# EAGLE board RastoMower (EAGLE 9.6.2), part 1 of 2
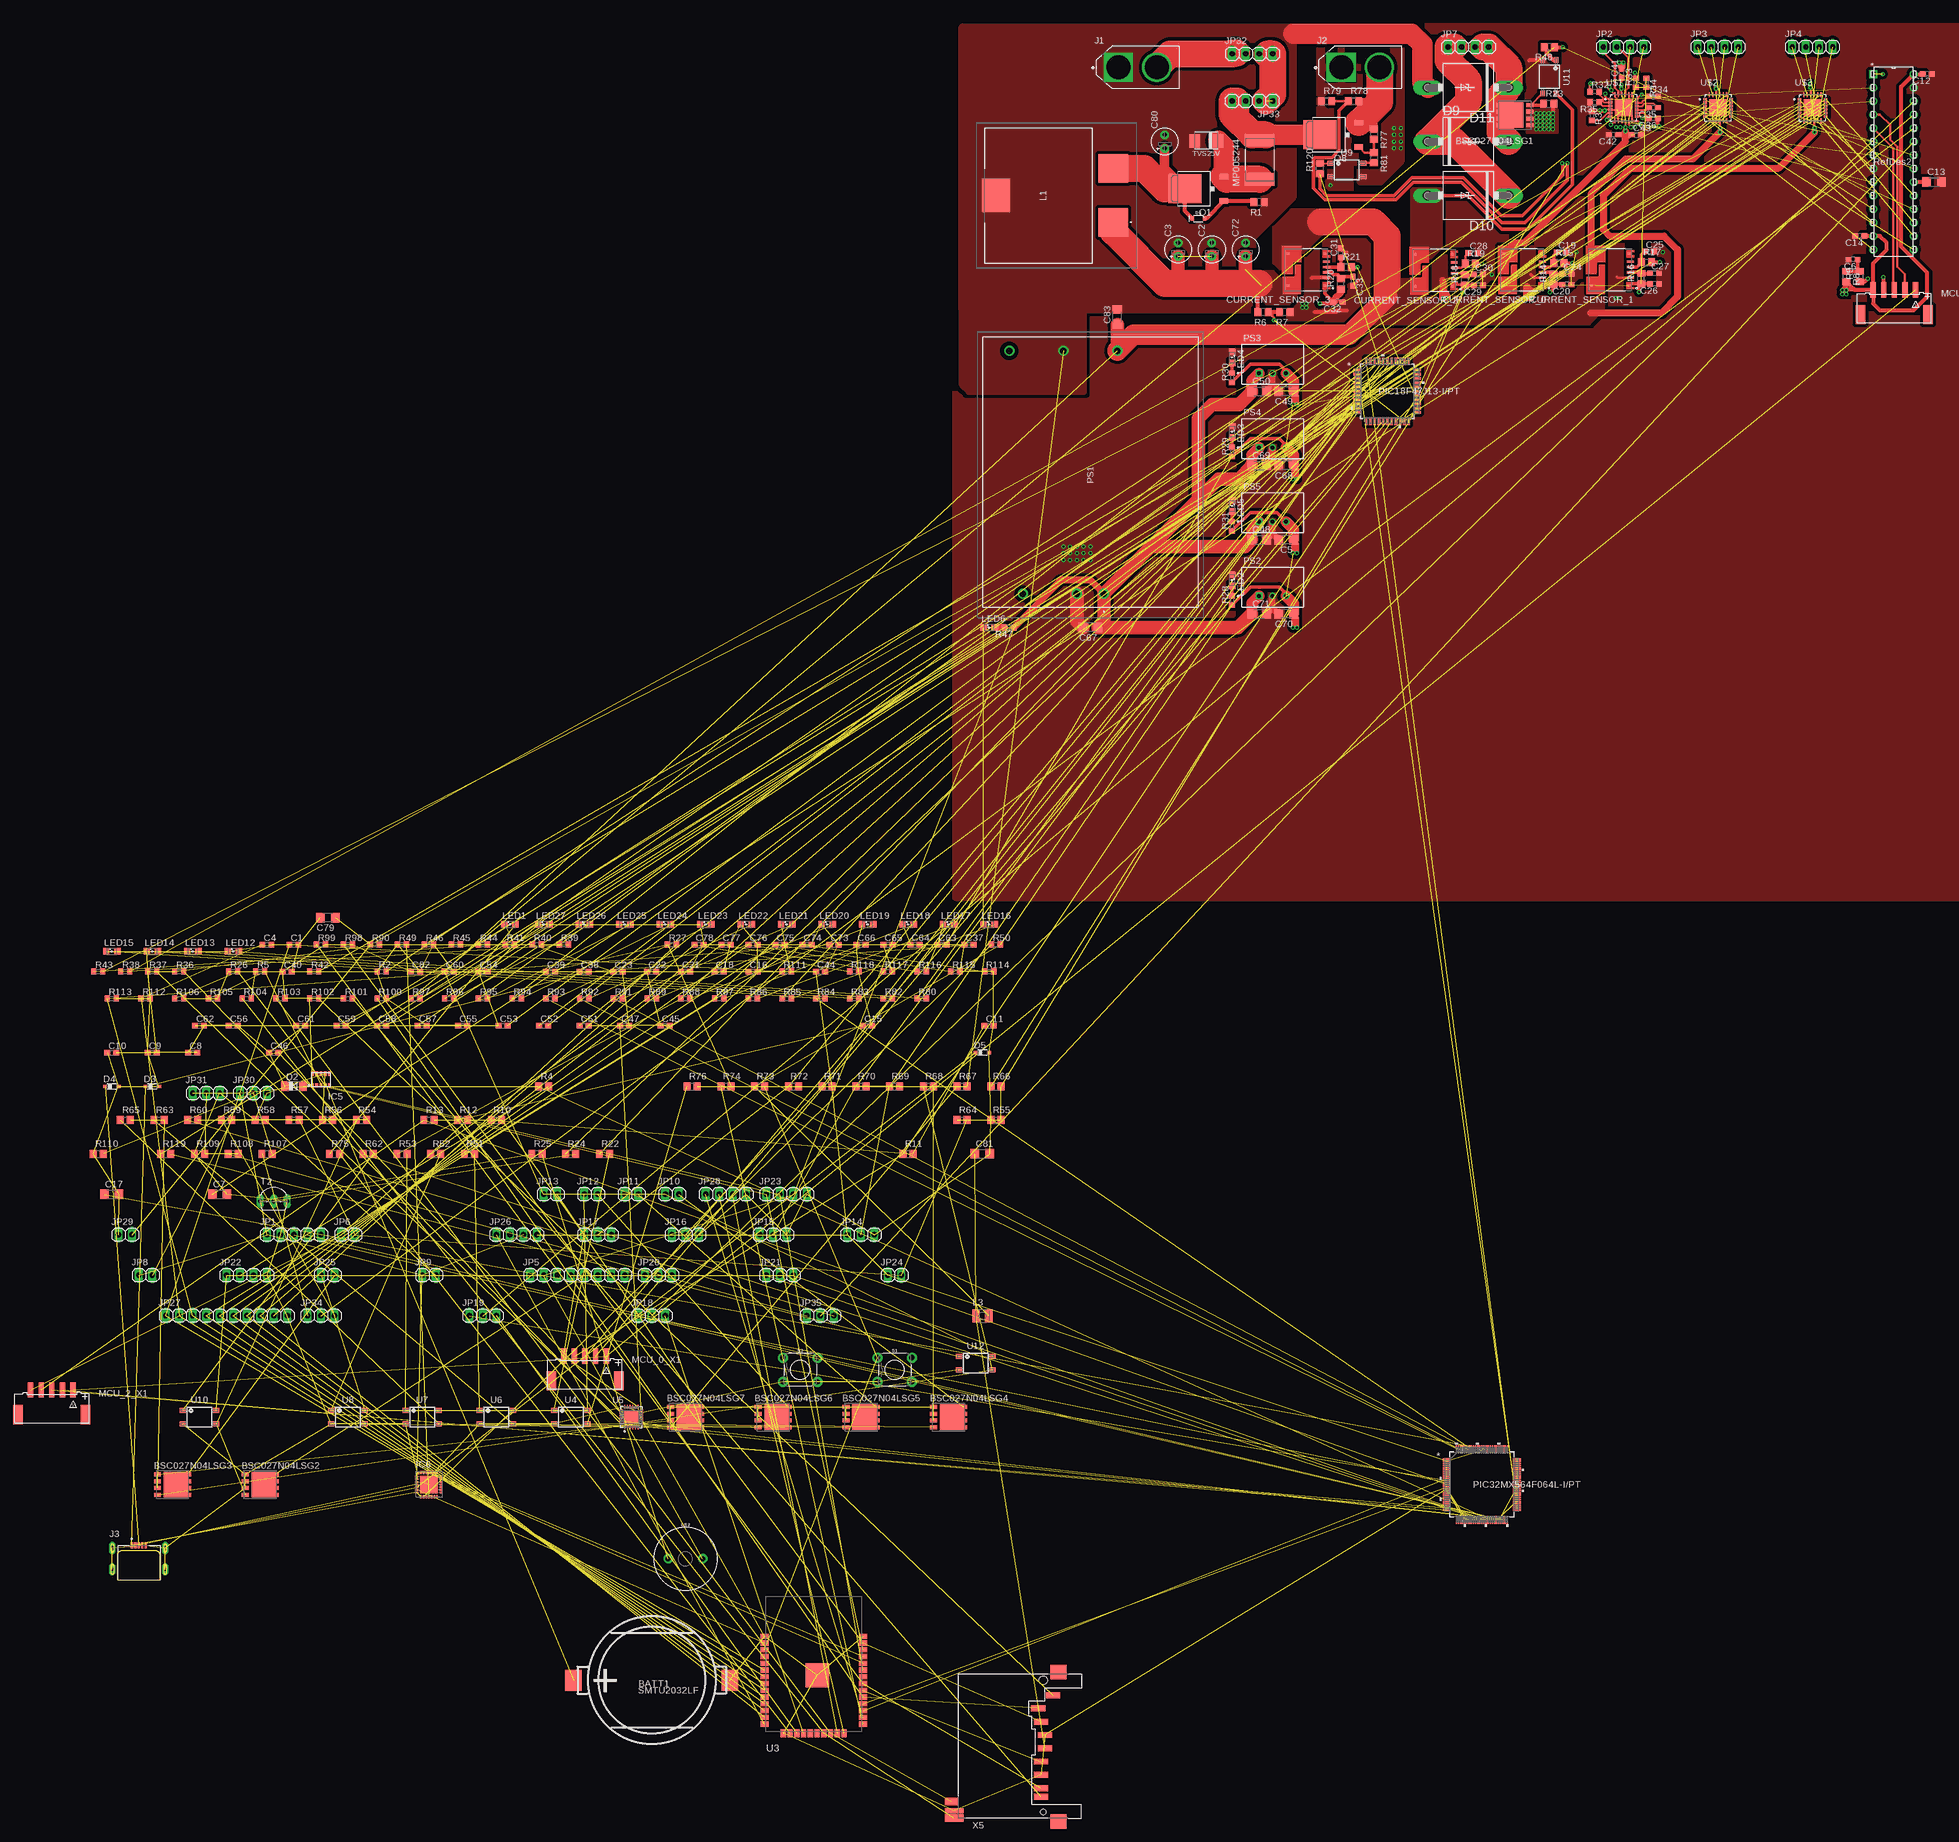
[diagram p0: board, top side]
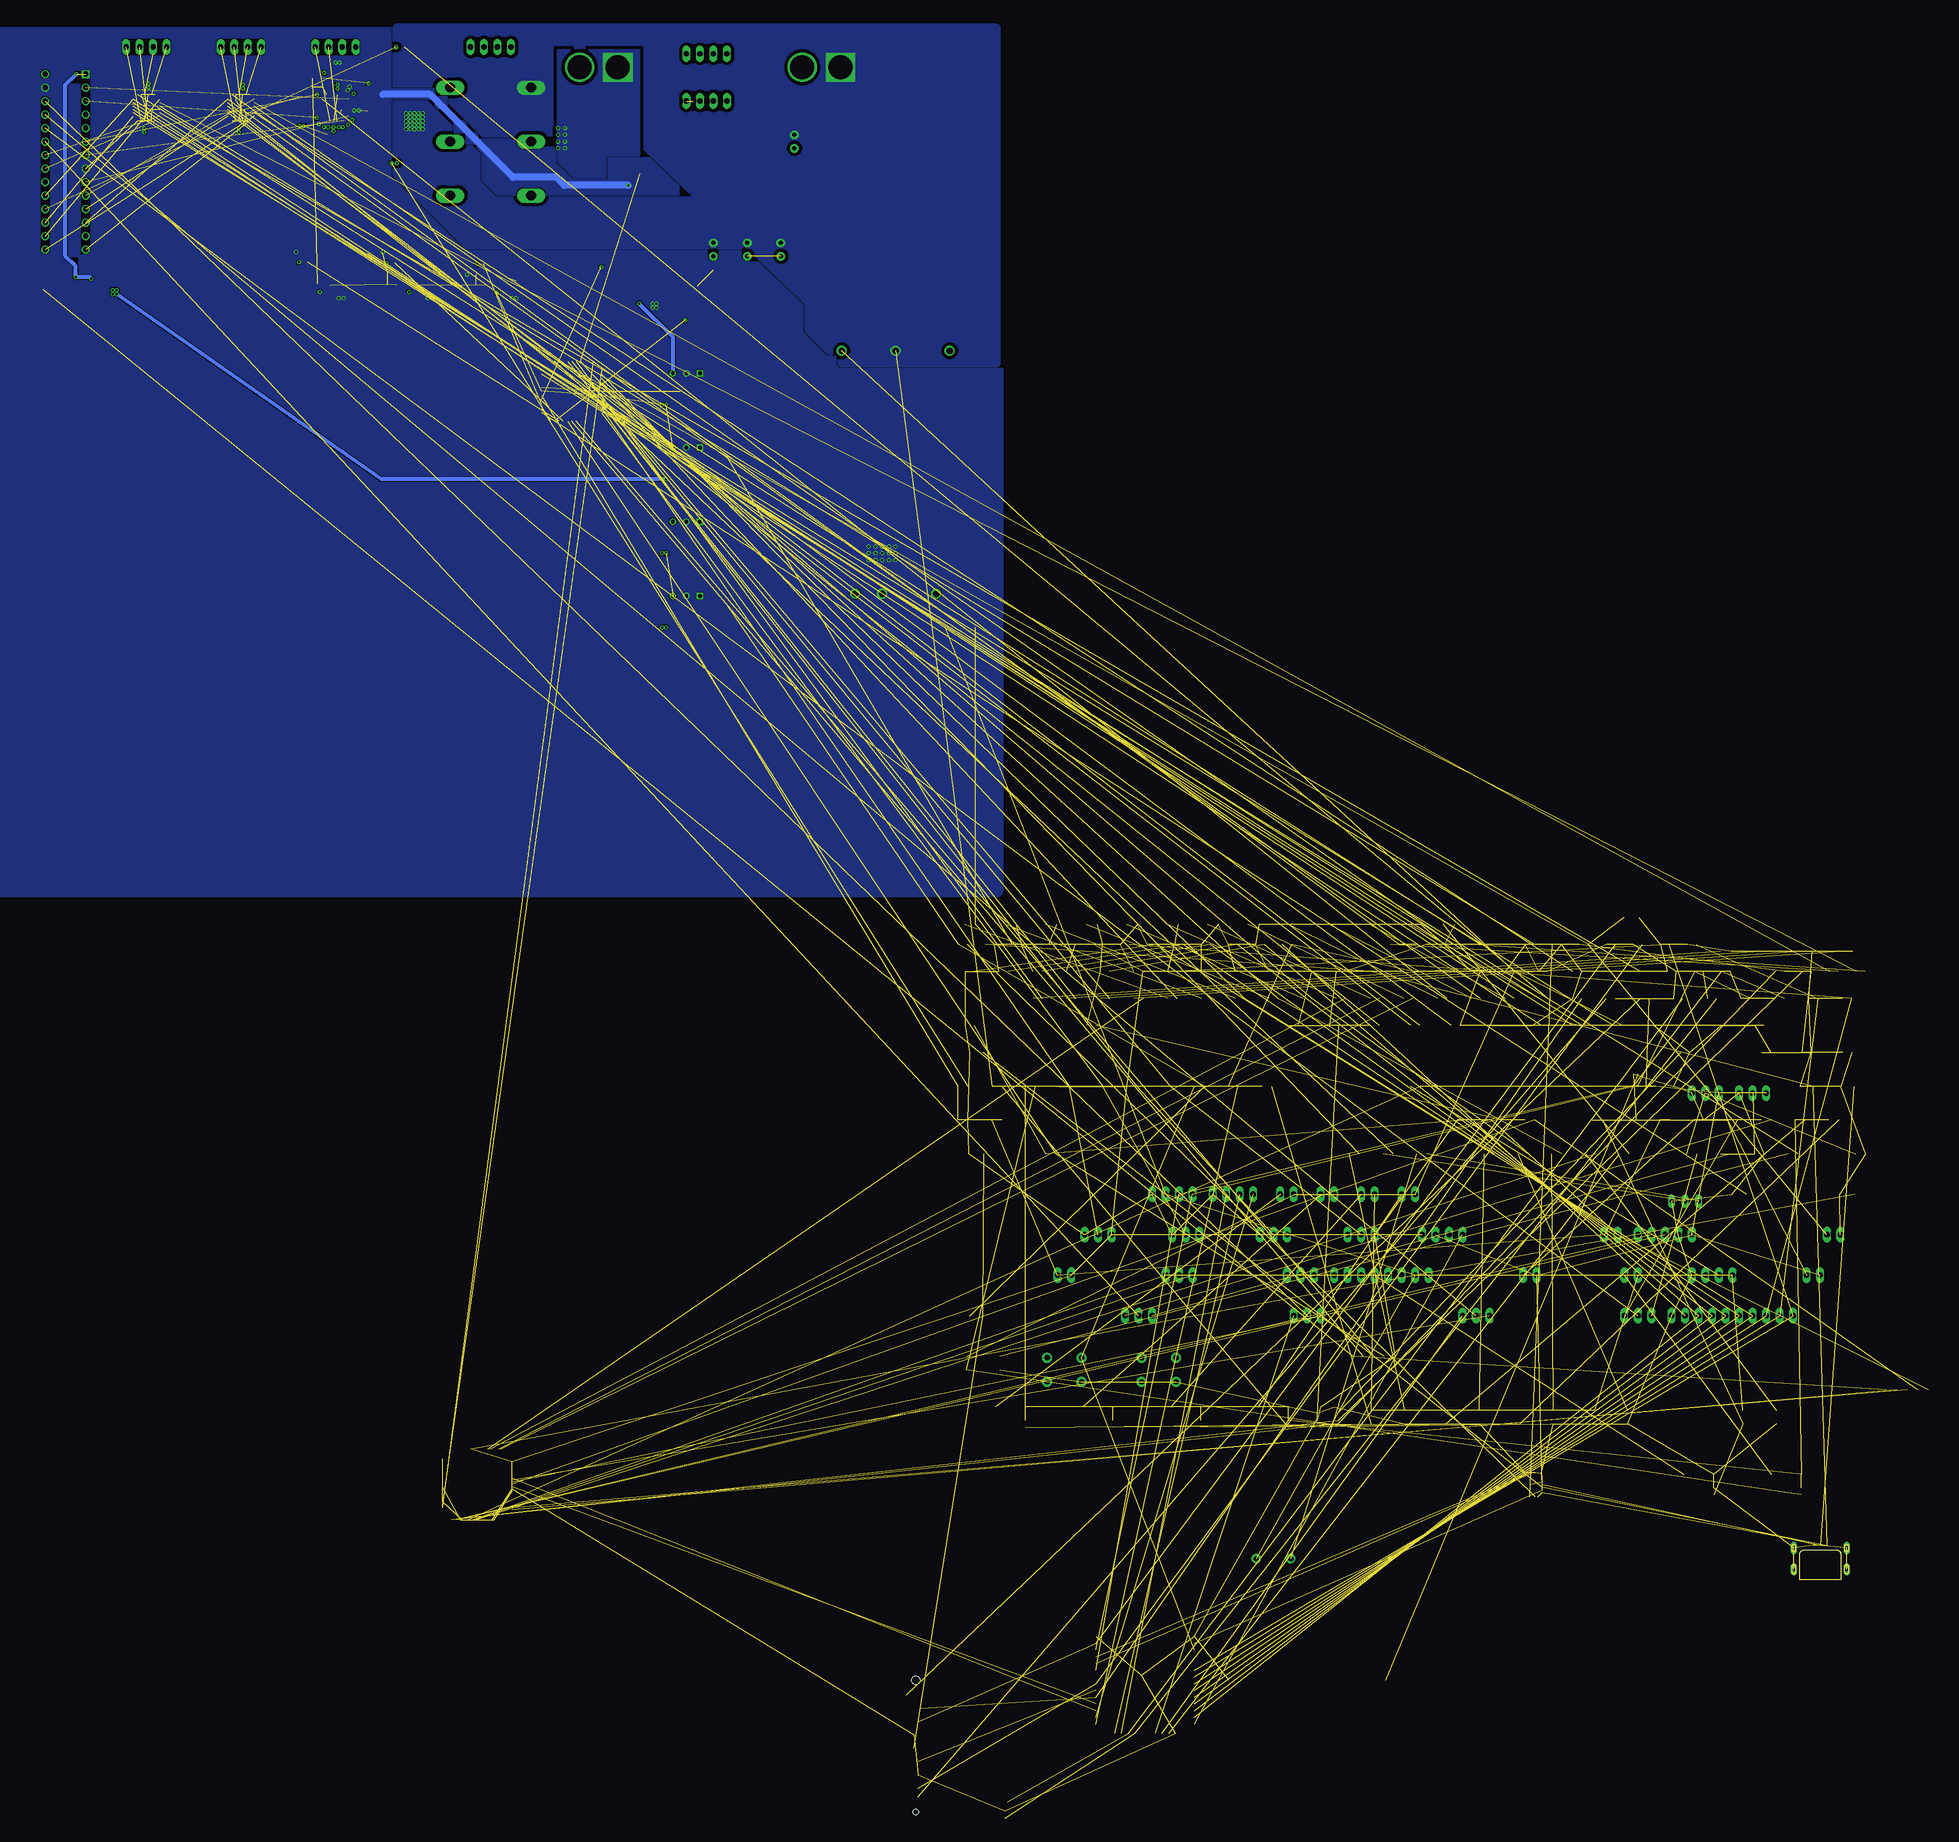
[diagram p1: board, bottom side, seen from below]

No outline drawn. Coordinates in mm, seen from the top.
Copper layers (1*16): Top 0.07mm / dielectric 1.5mm / Bottom 0.07mm
Design rules "default *": minimum track width 6mil, minimum drill 0.35mm, track to track 6mil, track to pad 6mil, pad to pad 6mil, via to via 6mil, smd to smd 6mil, copper to edge 40mil, drill to drill 6mil, minimum pad ring 10mil, minimum via ring 8mil, stop-mask expansion 4mil, vias tented up to drill 0mil, thermal gap 10mil

## Footprints (pad centres in the part's own frame; a part is rotated, then mirrored left to right if it is on the bottom)
SMTU2032LF = smd 3.1 x 4: MINUS 14.7,0; PLUS -14.7,0
PG-TDSON-8 = smd 1.3 x 0.75: 1 -2.825,1.905; 2 -2.825,0.635; 3 -2.825,-0.635; 4 -2.825,-1.905; 5 2.825,-1.905; 6 2.825,-0.635; 7 2.825,0.635; 8 2.825,1.905 | smd 4.7 x 4.8: TH 0.725,0
C0603 = smd 1.1 x 1: 1 -0.85,0; 2 0.85,0
E2,5-5 = drill 0.813 pad 1.6: + -1.27,0 | drill 0.813 pad 1.6 octagon: - 1.27,0
C1206 = smd 1.6 x 1.8: 1 -1.4,0; 2 1.4,0
IC_TLI4971A050T5UE0001XUMA1 = smd 0.4 x 0.4: 1 -3.5,3; 6 -3.5,-3; 7 3.5,-3; 8 3.5,3 | smd 1.3 x 0.4: 2 -3.8,1.5; 3 -3.8,0.5; 4 -3.8,-0.5; 5 -3.8,-1.5
SOD80C = smd 1.4 x 1.8: A 1.7,0; C -1.7,0
SOD323_ST = smd 0.8 x 0.6: A 1.25,0; C -1.25,0
SOD-323 = smd 0.63 x 0.83: A 1.15,0; C -1.15,0
AG = drill 1.803 long: A 7.62,0; C -7.62,0
SPDIP28_300MC = drill 0.991 square: 1 -7.62,33.02 | drill 0.991: 2 -7.62,30.48; 3 -7.62,27.94; 4 -7.62,25.4; 5 -7.62,22.86; 6 -7.62,20.32; 7 -7.62,17.78; 8 -7.62,15.24; 9 -7.62,12.7; 10 -7.62,10.16; 11 -7.62,7.62; 12 -7.62,5.08; 13 -7.62,2.54; 14 -7.62,0; 15 0,0; 16 0,2.54; 17 0,5.08; 18 0,7.62; 19 0,10.16; 20 0,12.7; 21 0,15.24; 22 0,17.78; 23 0,20.32; 24 0,22.86; 25 0,25.4; 26 0,27.94; 27 0,30.48; 28 0,33.02
AB-RTCMC-32.768KHZ-B5ZE-S3-T = smd 0.5 x 0.8: 1 -1.6,-1.1; 2 -0.8,-1.1; 3 0,-1.1; 4 0.8,-1.1; 5 1.6,-1.1; 6 1.6,1.1; 7 0.8,1.1; 8 0,1.1; 9 -0.8,1.1; 10 -1.6,1.1
MLP28 = smd 0.6 x 0.3: 1 -2.3,1.5; 2 -2.3,1; 3 -2.3,0.5; 4 -2.3,0; 5 -2.3,-0.5; 6 -2.3,-1; 7 -2.3,-1.5; 15 2.3,-1.5; 16 2.3,-1; 17 2.3,-0.5; 18 2.3,0; 19 2.3,0.5; 20 2.3,1; 21 2.3,1.5 | smd 0.3 x 0.6: 8 -1.5,-2.3; 9 -1,-2.3; 10 -0.5,-2.3; 11 0,-2.3; 12 0.5,-2.3; 13 1,-2.3; 14 1.5,-2.3; 22 1.5,2.3; 23 1,2.3; 24 0.5,2.3; 25 0,2.3; 26 -0.5,2.3; 27 -1,2.3; 28 -1.5,2.3 | smd 3.3 x 3.3: EXP 0,0 | smd 0.435 x 0.435: M -2.103,2.103
AMASS_XT60-M = drill 4.5 square: 1 -3.6,0 | drill 4.5: 2 3.6,0
MOLEX_47642-0001 = smd 0.45 x 1.1: 1 -1.3,0; 2 -0.65,0; 3 0,0; 4 0.65,0; 5 1.3,0 | drill 0.6 pad 1.2 long: S1 -4.95,-0.52; S2 -4.95,-4.52; S3 4.95,-4.52; S4 4.95,-0.52
1X05 = drill 1.016 long: 1 -5.08,0; 2 -2.54,0; 3 0,0; 4 2.54,0; 5 5.08,0
1X04 = drill 1.016 long: 1 -3.81,0; 2 -1.27,0; 3 1.27,0; 4 3.81,0
1X08 = drill 1.016 long: 1 -8.89,0; 2 -6.35,0; 3 -3.81,0; 4 -1.27,0; 5 1.27,0; 6 3.81,0; 7 6.35,0; 8 8.89,0
1X02 = drill 1.016 long: 1 -1.27,0; 2 1.27,0
1X03 = drill 1.016 long: 1 -2.54,0; 2 0,0; 3 2.54,0
1X10 = drill 1.016 long: 1 -11.43,0; 2 -8.89,0; 3 -6.35,0; 4 -3.81,0; 5 -1.27,0; 6 1.27,0; 7 3.81,0; 8 6.35,0; 9 8.89,0; 10 11.43,0
74436413300 = smd 5.33 x 5.59: 1 -5.075,-10.66; 2 5.075,-10.66 | smd 6.35 x 5.28: 3 0,11.415
L2825P = smd 1.4 x 2.4: 1 -1.2,0; 2 1.2,0
SML0805 = smd 1.2 x 1.2: A 1.05,0; C -1.05,0
BUZZER-12MM = drill 0.9 pad 1.778: + 3.25,0; - -3.25,0
BM05B-PASS = smd 1.8 x 3.6: A 0.15,-3.35; B -12.55,-3.35 | smd 1 x 2.9: P$1 -2.2,1.3; P$2 -4.2,1.3; P$3 -6.2,1.3; P$4 -8.2,1.3; P$5 -10.2,1.3
FUSE_0ZCF0075AF2C = smd 2.3 x 5.6: 1 -3.7,0; 2 3.7,0
TEN251211 = drill 1.25 pad 1.875: 1 0,0; 2 0,-5.08; 3 0,-15.24; 5 -45.72,2.54; 6 -45.72,-7.62; 7 -45.72,-17.78
CONV_TSR_1-2433E = drill 0.73 pad 1.13 square: 1 -2.54,-1.7 | drill 0.73 pad 1.13: 2 0,-1.7; 3 2.54,-1.7
TO252 = smd 1 x 1.6: 1 -2.28,-4.8; 2 2.28,-4.8 | smd 5.4 x 6.2: 3 0,2.5
R0805 = smd 1.3 x 1.5: 1 -0.95,0; 2 0.95,0
R0603 = smd 1 x 1.1: 1 -0.85,0; 2 0.85,0
TACTILE_SWITCH_PTH_6.0MM = drill 1.016 pad 1.88: 1 -3.251,2.261; 2 3.251,2.261; 3 -3.251,-2.261; 4 3.251,-2.261
TO92-CBE = drill 0.813 long: B 0,0; C -2.54,0; E 2.54,0
SUPRESSOR_SMAJ = smd 2 x 2.5: A 2.223,0; C -2.223,0
TQFP44_10X10MC_MCH = smd 1.473 x 0.508: 1 -5.613,4; 2 -5.613,3.2; 3 -5.613,2.4; 4 -5.613,1.6; 5 -5.613,0.8; 6 -5.613,0; 7 -5.613,-0.8; 8 -5.613,-1.6; 9 -5.613,-2.4; 10 -5.613,-3.2; 11 -5.613,-4; 23 5.613,-4; 24 5.613,-3.2; 25 5.613,-2.4; 26 5.613,-1.6; 27 5.613,-0.8; 28 5.613,0; 29 5.613,0.8; 30 5.613,1.6; 31 5.613,2.4; 32 5.613,3.2; 33 5.613,4 | smd 0.508 x 1.473: 12 -4,-5.613; 13 -3.2,-5.613; 14 -2.4,-5.613; 15 -1.6,-5.613; 16 -0.8,-5.613; 17 0,-5.613; 18 0.8,-5.613; 19 1.6,-5.613; 20 2.4,-5.613; 21 3.2,-5.613; 22 4,-5.613; 34 4,5.613; 35 3.2,5.613; 36 2.4,5.613; 37 1.6,5.613; 38 0.8,5.613; 39 0,5.613; 40 -0.8,5.613; 41 -1.6,5.613; 42 -2.4,5.613; 43 -3.2,5.613; 44 -4,5.613
TQFP100_12X12MC_MCH = smd 1.473 x 0.229: 1 -6.617,4.8; 2 -6.617,4.4; 3 -6.617,4; 4 -6.617,3.6; 5 -6.617,3.2; 6 -6.617,2.8; 7 -6.617,2.4; 8 -6.617,2; 9 -6.617,1.6; 10 -6.617,1.2; 11 -6.617,0.8; 12 -6.617,0.4; 13 -6.617,0; 14 -6.617,-0.4; 15 -6.617,-0.8; 16 -6.617,-1.2; 17 -6.617,-1.6; 18 -6.617,-2; 19 -6.617,-2.4; 20 -6.617,-2.8; 21 -6.617,-3.2; 22 -6.617,-3.6; 23 -6.617,-4; 24 -6.617,-4.4; 25 -6.617,-4.8; 51 6.617,-4.8; 52 6.617,-4.4; 53 6.617,-4; 54 6.617,-3.6; 55 6.617,-3.2; 56 6.617,-2.8; 57 6.617,-2.4; 58 6.617,-2; 59 6.617,-1.6; 60 6.617,-1.2; 61 6.617,-0.8; 62 6.617,-0.4; 63 6.617,0; 64 6.617,0.4; 65 6.617,0.8; 66 6.617,1.2; 67 6.617,1.6; 68 6.617,2; 69 6.617,2.4; 70 6.617,2.8; 71 6.617,3.2; 72 6.617,3.6; 73 6.617,4; 74 6.617,4.4; 75 6.617,4.8 | smd 0.229 x 1.473: 26 -4.8,-6.617; 27 -4.4,-6.617; 28 -4,-6.617; 29 -3.6,-6.617; 30 -3.2,-6.617; 31 -2.8,-6.617; 32 -2.4,-6.617; 33 -2,-6.617; 34 -1.6,-6.617; 35 -1.2,-6.617; 36 -0.8,-6.617; 37 -0.4,-6.617; 38 0,-6.617; 39 0.4,-6.617; 40 0.8,-6.617; 41 1.2,-6.617; 42 1.6,-6.617; 43 2,-6.617; 44 2.4,-6.617; 45 2.8,-6.617; 46 3.2,-6.617; 47 3.6,-6.617; 48 4,-6.617; 49 4.4,-6.617; 50 4.8,-6.617; 76 4.8,6.617; 77 4.4,6.617; 78 4,6.617; 79 3.6,6.617; 80 3.2,6.617; 81 2.8,6.617; 82 2.4,6.617; 83 2,6.617; 84 1.6,6.617; 85 1.2,6.617; 86 0.8,6.617; 87 0.4,6.617; 88 0,6.617; 89 -0.4,6.617; 90 -0.8,6.617; 91 -1.2,6.617; 92 -1.6,6.617; 93 -2,6.617; 94 -2.4,6.617; 95 -2.8,6.617; 96 -3.2,6.617; 97 -3.6,6.617; 98 -4,6.617; 99 -4.4,6.617; 100 -4.8,6.617
ESP-32S = smd 1.5 x 1: 1 -9.25,7; 2 -9.25,5.73; 3 -9.25,4.46; 4 -9.25,3.19; 5 -9.25,1.92; 6 -9.25,0.65; 7 -9.25,-0.62; 8 -9.25,-1.89; 9 -9.25,-3.16; 10 -9.25,-4.43; 11 -9.25,-5.7; 12 -9.25,-6.97; 13 -9.25,-8.24; 14 -9.25,-9.51; 25 9.25,-9.51; 26 9.25,-8.24; 27 9.25,-6.97; 28 9.25,-5.7; 29 9.25,-4.43; 30 9.25,-3.16; 31 9.25,-1.89; 32 9.25,-0.62; 33 9.25,0.65; 34 9.25,1.92; 35 9.25,3.19; 36 9.25,4.46; 37 9.25,5.73; 38 9.25,7 | smd 1 x 1.5: 15 -5.7,-11.25; 16 -4.43,-11.25; 17 -3.16,-11.25; 18 -1.89,-11.25; 19 -0.62,-11.25; 20 0.65,-11.25; 21 1.92,-11.25; 22 3.19,-11.25; 23 4.46,-11.25; 24 5.73,-11.25 | smd 4.5 x 4.5: GND 0.68,-0.33
WL-OCPT_SOP4 = smd 1.1 x 0.9: 1 -3.15,1.27; 2 -3.15,-1.27; 3 3.15,-1.27; 4 3.15,1.27
24-VFQFN = smd 0.26 x 0.69: 1 -1.25,-1.92; 2 -0.75,-1.92; 3 -0.25,-1.92; 4 0.25,-1.92; 5 0.75,-1.92; 6 1.25,-1.92; 13 1.25,1.92; 14 0.75,1.92; 15 0.25,1.92; 16 -0.25,1.92; 17 -0.75,1.92; 18 -1.25,1.92 | smd 0.69 x 0.26: 7 1.92,-1.25; 8 1.92,-0.75; 9 1.92,-0.25; 10 1.92,0.25; 11 1.92,0.75; 12 1.92,1.25; 19 -1.92,1.25; 20 -1.92,0.75; 21 -1.92,0.25; 22 -1.92,-0.25; 23 -1.92,-0.75; 24 -1.92,-1.25 | smd 2.7 x 2.6: 25 0,0
QFN65P500X500X100-25N = smd 0.81 x 0.32: 1 -2.45,1.625; 2 -2.45,0.975; 3 -2.45,0.325; 4 -2.45,-0.325; 5 -2.45,-0.975; 6 -2.45,-1.625; 13 2.45,-1.625; 14 2.45,-0.975; 15 2.45,-0.325; 16 2.45,0.325; 17 2.45,0.975; 18 2.45,1.625 | smd 0.32 x 0.81: 7 -1.625,-2.45; 8 -0.975,-2.45; 9 -0.325,-2.45; 10 0.325,-2.45; 11 0.975,-2.45; 12 1.625,-2.45; 19 1.625,2.45; 20 0.975,2.45; 21 0.325,2.45; 22 -0.325,2.45; 23 -0.975,2.45; 24 -1.625,2.45 | smd 3.25 x 3.25: 25 0,0
FPS009-3000 = smd 2.65 x 1.1: 1 -0.915,-5.3; 2 -0.415,-7.8; 3 0.385,-10.3; 4 0.385,-12.8; 5 -0.415,-15.3; 6 -0.415,-17.8; 7 -0.415,-20.3; 8 -0.415,-21.925; 9 1.885,-2.8 | smd 3.5 x 1: COM_TERM -16.75,-24.55 | smd 2.5 x 1.4: DETECT -17.25,-22.85 | smd 3 x 2.7: M1 2.85,1.55; M2 2.85,-26.55 | smd 3.5 x 1.4: WRITE_PROT -16.75,-25.95 | hole 1.6: 0,0 | hole 1.1: 0,-24.8

## Placement (x,y rotation side)
BATT1  SMTU2032LF  [SMTU2032LF]  -81.28,57.15 0 top
BSC027N04LSG1  BSC340N08NS3G  [PG-TDSON-8]  81.15,351.66 180 top
BSC027N04LSG2  BSC340N08NS3G  [PG-TDSON-8]  -154.94,93.98 0 top
BSC027N04LSG3  BSC340N08NS3G  [PG-TDSON-8]  -171.45,93.98 0 top
BSC027N04LSG4  BSC340N08NS3G  [PG-TDSON-8]  -25.4,106.68 0 top
BSC027N04LSG5  BSC340N08NS3G  [PG-TDSON-8]  -41.91,106.68 0 top
BSC027N04LSG6  BSC340N08NS3G  [PG-TDSON-8]  -58.42,106.68 0 top
BSC027N04LSG7  BSC340N08NS3G  [PG-TDSON-8]  -74.93,106.68 0 top
C1  10n  [C0603]  -148.59,195.58 0 top
C2  220u  [E2,5-5]  24.13,326.39 90 top
C3  220u  [E2,5-5]  17.78,326.39 90 top
C4  10n  [C0603]  -153.67,195.58 0 top
C5  4.7u  [C1206]  38.1,271.78 180 top
C6  100nF  [C0603]  144.78,324.49 180 top
C7  10u 6.3V  [C1206]  -162.56,148.59 0 top
C8  100nF  [C0603]  -167.64,175.26 0 top
C9  100nF  [C0603]  -175.26,175.26 0 top
C10  100nF  [C0603]  -182.88,175.26 0 top
C11  100nF  [C0603]  -17.78,180.34 0 top
C12  100nF  [C0603]  158.75,359.41 180 top
C13  10u 6.3V  [C1206]  160.02,339.09 0 top
C14  100nF  [C0603]  146.05,328.93 180 top
C15  100nF  [C0603]  -40.64,180.34 0 top
C16  100n  [C0603]  -62.23,190.5 0 top
C17  10u 6.3V  [C1206]  -182.88,148.59 0 top
C18  100n  [C0603]  -68.58,190.5 0 top
C19  6.8nF 25V  [C0603]  89.92,325.88 0 top
C20  6.8nF 25V  [C0603]  90.93,319.79 180 top
C21  100n  [C0603]  -74.93,190.5 0 top
C22  100n  [C0603]  -81.28,190.5 0 top
C23  100n  [C0603]  -87.63,190.5 0 top
C24  6.8nF 25V  [C0603]  90.93,321.82 0 top
C25  6.8nF 25V  [C0603]  106.43,326.01 0 top
C26  6.8nF 25V  [C0603]  107.44,319.91 180 top
C27  6.8nF 25V  [C0603]  107.44,321.94 0 top
C28  6.8nF 25V  [C0603]  73.28,325.75 0 top
C29  6.8nF 25V  [C0603]  74.3,319.66 180 top
C30  6.8nF 25V  [C0603]  74.3,321.69 0 top
C31  6.8nF 25V  [C0603]  48.39,325.75 90 top
C32  6.8nF 25V  [C0603]  47.88,316.48 180 top
C33  6.8nF 25V  [C0603]  50.67,320.42 270 top
C34  220nF  [C0603]  107.19,355.22 0 top
C35  100nF  [C0603]  107.19,353.06 180 top
C36  100nF  [C0603]  107.19,351.03 180 top
C37  1u  [C0603]  -21.59,195.58 0 top
C38  100n  [C0603]  -93.98,190.5 0 top
C39  100n  [C0603]  -100.33,190.5 0 top
C40  4.7u  [C0603]  -149.86,190.5 0 top
C41  100n  [C0603]  101.22,359.54 90 top
C42  100nF  [C0603]  99.69,347.98 180 top
C43  4.7uF  [C0603]  104.01,347.98 0 top
C44  10nF  [C0603]  -49.53,190.5 0 top
C45  100nF  [C0603]  -78.74,180.34 0 top
C46  2.2nF 50V  [C0603]  -152.4,175.26 0 top
C47  100nF  [C0603]  -86.36,180.34 0 top
C48  4.7u  [C1206]  33.02,271.78 0 top
C49  4.7u  [C1206]  38.1,299.72 180 top
C50  4.7u  [C1206]  33.02,299.72 0 top
C51  220nF  [C0603]  -93.98,180.34 0 top
C52  100nF  [C0603]  -101.6,180.34 0 top
C53  100nF  [C0603]  -109.22,180.34 0 top
C54  100n  [C0603]  -113.03,190.5 0 top
C55  100nF  [C0603]  -116.84,180.34 0 top
C56  4.7uF  [C0603]  -160.02,180.34 0 top
C57  220nF  [C0603]  -124.46,180.34 0 top
C58  100nF  [C0603]  -132.08,180.34 0 top
C59  100nF  [C0603]  -139.7,180.34 0 top
C60  100n  [C0603]  -119.38,190.5 0 top
C61  100nF  [C0603]  -147.32,180.34 0 top
C62  4.7uF  [C0603]  -166.37,180.34 0 top
C63  1u  [C0603]  -26.67,195.58 0 top
C64  1u  [C0603]  -31.75,195.58 0 top
C65  1u  [C0603]  -36.83,195.58 0 top
C66  1u  [C0603]  -41.91,195.58 0 top
C67  4.7u  [C1206]  1.27,255.27 180 top
C68  4.7u  [C1206]  38.1,285.75 180 top
C69  4.7u  [C1206]  33.02,285.75 0 top
C70  4.7u  [C1206]  38.1,257.81 180 top
C71  4.7u  [C1206]  33.02,257.81 0 top
C72  220u  [E2,5-5]  30.48,326.39 90 top
C73  10n  [C0603]  -46.99,195.58 0 top
C74  10n  [C0603]  -52.07,195.58 0 top
C75  10n  [C0603]  -57.15,195.58 0 top
C76  10n  [C0603]  -62.23,195.58 0 top
C77  10n  [C0603]  -67.31,195.58 0 top
C78  10n  [C0603]  -72.39,195.58 0 top
C79  100n  [C1206]  -142.24,200.66 180 top
C80  220u  [E2,5-5]  15.24,346.71 90 top
C81  47u/6V3  [C1206]  -19.05,156.21 0 top
C82  100n  [C0603]  -125.73,190.5 0 top
C83  4.7u  [C1206]  6.35,313.69 90 top
CURRENT_SENSOR_0  TLI4971A050T5UE0001XUMA1  [IC_TLI4971A050T5UE0001XUMA1]  82.55,322.58 180 top
CURRENT_SENSOR_1  TLI4971A050T5UE0001XUMA1  [IC_TLI4971A050T5UE0001XUMA1]  99.06,322.58 180 top
CURRENT_SENSOR_2  TLI4971A050T5UE0001XUMA1  [IC_TLI4971A050T5UE0001XUMA1]  65.91,322.45 180 top
CURRENT_SENSOR_3  TLI4971A050T5UE0001XUMA1  [IC_TLI4971A050T5UE0001XUMA1]  41.91,322.58 180 top
D2  3V3  [SOD80C]  -148.59,168.91 0 top
D3  BAT60J  [SOD323_ST]  -175.26,168.91 0 top
D4  BAT60J  [SOD323_ST]  -182.88,168.91 0 top
D5  BAT60J  [SOD323_ST]  -19.05,175.26 0 top
D6  6.8V  [SOD-323]  21.59,332.23 0 top
D9  [AG]  72.39,346.71 0 top
D10  [AG]  72.39,336.55 180 top
D11  [AG]  72.39,356.87 180 top
IC1  PIC24FJ32GA002-X  [SPDIP28_300MC]  156.21,326.39 0 top
IC5  [AB-RTCMC-32.768KHZ-B5ZE-S3-T]  -143.51,170.18 0 top
IC6  CP2102  [MLP28]  -123.19,93.98 0 top
J1  XT60-M  [AMASS_XT60-M]  10.16,360.68 0 top
J2  XT60-M  [AMASS_XT60-M]  52.07,360.68 0 top
J3  MICROUSB  [MOLEX_47642-0001]  -177.8,82.55 0 top
JP1  GPS MODULE  [1X05]  -148.59,140.97 0 top
JP2  STEPPER_0  [1X04]  101.6,364.49 0 top
JP3  STEPPER_1  [1X04]  119.38,364.49 0 top
JP4  STEPPER_2  [1X04]  137.16,364.49 0 top
JP5  LIDAR  [1X08]  -95.25,133.35 0 top
JP6  RAIN SENSOR  [1X02]  -138.43,140.97 0 top
JP7  BLADE MOTOR  [1X04]  72.39,364.49 0 top
JP8  LIMIT SWITCH UP  [1X02]  -176.53,133.35 0 top
JP9  LIMIT SWITCH DOWN  [1X02]  -123.19,133.35 0 top
JP10  FAN_0  [1X02]  -77.47,148.59 0 top
JP11  FAN_1  [1X02]  -85.09,148.59 0 top
JP12  FAN_2  [1X02]  -92.71,148.59 0 top
JP13  FAN_3  [1X02]  -100.33,148.59 0 top
JP14  TEMP SENSOR 0  [1X03]  -41.91,140.97 0 top
JP15  TEMP SENSOR 1  [1X03]  -58.42,140.97 0 top
JP16  TEMP SENSOR 2  [1X03]  -74.93,140.97 0 top
JP17  TEMP SENSOR 3  [1X03]  -91.44,140.97 0 top
JP18  MOTOR DRIVER UART RX SWITCH  [1X03]  -81.28,125.73 0 top
JP19  MOTOR DRIVER UART TX SWITCH  [1X03]  -113.03,125.73 0 top
JP20  LIDAR UART TX SWITCH  [1X03]  -80.01,133.35 0 top
JP21  LIDAR UART RX SWITCH  [1X03]  -57.15,133.35 0 top
JP22  PER.WIRE SENSE  [1X04]  -157.48,133.35 0 top
JP23  DISPLAY  [1X04]  -55.88,148.59 0 top
JP24  PHOTORESISTOR LDR5549  [1X02]  -35.56,133.35 0 top
JP25  EMERGENCY LIGHT  [1X02]  -142.24,133.35 0 top
JP26  ESP32_CAMERA  [1X04]  -106.68,140.97 0 top
JP27  BUTTONS  [1X10]  -161.29,125.73 0 top
JP28  RGB_LED  [1X04]  -67.31,148.59 0 top
JP29  TILT SENSOR  [1X02]  -180.34,140.97 0 top
JP30  [1X03]  -156.21,167.64 0 top
JP31  [1X03]  -165.1,167.64 0 top
JP32  MAIN SWITCH  [1X04]  31.75,363.22 0 top
JP33  CUTOFF SWITCH  [1X04]  31.75,354.33 180 top
JP34  UPPER LIMIT SWITCH SELECTOR  [1X03]  -143.51,125.73 0 top
JP35  BOTTOM LIMIT SWITCH SELECTOR  [1X03]  -49.53,125.73 0 top
L1  7443641500  [74436413300]  -5.08,336.55 90 top
L3  2112805  [L2825P]  -19.05,125.73 0 top
LED1  [SML0805]  -107.95,199.39 0 top
LED2  [SML0805]  27.94,264.16 270 top
LED3  [SML0805]  27.94,292.1 270 top
LED4  [SML0805]  27.94,306.07 270 top
LED5  [SML0805]  27.94,278.13 270 top
LED6  [SML0805]  -17.78,255.27 0 top
LED12  [SML0805]  -160.02,194.31 0 top
LED13  [SML0805]  -167.64,194.31 0 top
LED14  [SML0805]  -175.26,194.31 0 top
LED15  [SML0805]  -182.88,194.31 0 top
LED16  [SML0805]  -17.78,199.39 0 top
LED17  [SML0805]  -25.4,199.39 0 top
LED18  [SML0805]  -33.02,199.39 0 top
LED19  [SML0805]  -40.64,199.39 0 top
LED20  [SML0805]  -48.26,199.39 0 top
LED21  [SML0805]  -55.88,199.39 0 top
LED22  [SML0805]  -63.5,199.39 0 top
LED23  [SML0805]  -71.12,199.39 0 top
LED24  [SML0805]  -78.74,199.39 0 top
LED25  [SML0805]  -86.36,199.39 0 top
LED26  [SML0805]  -93.98,199.39 0 top
LED27  [SML0805]  -101.6,199.39 0 top
LS2  BUZZER-PTH  [BUZZER-12MM]  -74.93,80.01 0 top
MCU_0_X1  BM05B-PASS_STANDARD  [BM05B-PASS]  -87.63,116.84 0 top
MCU_1_X2  BM05B-PASS_STANDARD  [BM05B-PASS]  158.75,317.5 0 top
MCU_2_X1  BM05B-PASS_STANDARD  [BM05B-PASS]  -187.96,110.49 0 top
MP005244  0ZCF0075AF2C  [FUSE_0ZCF0075AF2C]  33.15,343.28 90 top
PS1  TEN_25-1211  [TEN251211]  3.81,261.62 270 top
PS2  TSR_1-2433E  [CONV_TSR_1-2433E]  35.56,262.89 0 top
PS3  TSR_1-2433E  [CONV_TSR_1-2433E]  35.56,304.8 0 top
PS4  TSR_1-2433E  [CONV_TSR_1-2433E]  35.56,290.83 0 top
PS5  TSR_1-2433E  [CONV_TSR_1-2433E]  35.56,276.86 0 top
Q1  FDD4141TO252  [TO252]  21.59,337.82 90 top
Q8  FDD4141TO252  [TO252]  46.99,347.98 90 top
R1  100R  [R0805]  33.02,335.28 180 top
R2  220k  [R0603]  -132.08,190.5 0 top
R3  220k  [R0603]  95.63,351.54 270 top
R4  1k  [R0805]  -101.6,168.91 0 top
R5  4.7k  [R0603]  -154.94,190.5 0 top
R6  1M  [R0805]  33.78,314.58 180 top
R7  110k  [R0805]  37.85,314.58 180 top
R8  10k  [R0805]  143.51,321.31 270 top
R9  1k  [R0805]  146.05,321.31 90 top
R10  10k  [R0805]  -110.49,162.56 0 top
R11  100R  [R0805]  -33.02,156.21 0 top
R12  10k  [R0805]  -116.84,162.56 0 top
R13  1k  [R0805]  -123.19,162.56 0 top
R14  220R  [R0805]  88.39,320.8 90 top
R15  220R  [R0805]  89.41,323.85 0 top
R16  220R  [R0805]  104.9,320.93 90 top
R17  220R  [R0805]  105.92,323.98 0 top
R18  220R  [R0805]  71.75,320.68 90 top
R19  220R  [R0805]  72.77,323.72 0 top
R20  220R  [R0805]  48.39,319.91 90 top
R21  220R  [R0805]  49.4,323.09 0 top
R22  200R  [R0805]  -90.17,156.21 0 top
R23  1k  [R0805]  87.5,353.82 0 top
R24  100R  [R0805]  -96.52,156.21 0 top
R25  100R  [R0805]  -102.87,156.21 0 top
R26  4.7k  [R0603]  -160.02,190.5 0 top
R27  1k  [R0603]  -77.47,195.58 0 top
R28  100R  [R0603]  27.94,260.35 90 top
R29  100R  [R0603]  27.94,288.29 90 top
R30  100R  [R0603]  27.94,302.26 90 top
R31  100R  [R0603]  27.94,274.32 90 top
R32  1.5k  [R0603]  96.14,356.11 0 top
R33  10k  [R0603]  103.89,357.76 90 top
R34  0R  [R0603]  105.92,357.76 270 top
R35  39k  [R0603]  96.14,354.08 180 top
R36  4.7k  [R0603]  -170.18,190.5 0 top
R37  4.7k  [R0603]  -175.26,190.5 0 top
R38  1.5k  [R0603]  -180.34,190.5 0 top
R39  10k  [R0603]  -97.79,195.58 0 top
R40  0R  [R0603]  -102.87,195.58 0 top
R41  39k  [R0603]  -107.95,195.58 0 top
R42  220k  [R0603]  -144.78,190.5 0 top
R43  1.5k  [R0603]  -185.42,190.5 0 top
R44  10k  [R0603]  -113.03,195.58 0 top
R45  0R  [R0603]  -118.11,195.58 0 top
R46  39k  [R0603]  -123.19,195.58 0 top
R47  200R  [R0603]  -13.97,255.27 180 top
R48  100R  [R0805]  87.63,364.49 180 top
R49  10k  [R0603]  -128.27,195.58 0 top
R50  4.7k  [R0603]  -16.51,195.58 0 top
R51  200R  [R0805]  -115.57,156.21 0 top
R52  200R  [R0805]  -121.92,156.21 0 top
R53  200R  [R0805]  -128.27,156.21 0 top
R54  1k  [R0805]  -135.89,162.56 0 top
R55  500k  [R0805]  -16.51,162.56 0 top
R56  10k  [R0805]  -142.24,162.56 0 top
R57  10R  [R0805]  -148.59,162.56 0 top
R58  10k  [R0805]  -154.94,162.56 0 top
R59  10k  [R0805]  -161.29,162.56 0 top
R60  10k  [R0805]  -167.64,162.56 0 top
R62  200R  [R0805]  -134.62,156.21 0 top
R63  1k  [R0805]  -173.99,162.56 0 top
R64  500k  [R0805]  -22.86,162.56 0 top
R65  1k  [R0805]  -180.34,162.56 0 top
R66  10R  [R0805]  -16.51,168.91 0 top
R67  1k  [R0805]  -22.86,168.91 0 top
R68  1k  [R0805]  -29.21,168.91 0 top
R69  5k  [R0805]  -35.56,168.91 0 top
R70  5k  [R0805]  -41.91,168.91 0 top
R71  5k  [R0805]  -48.26,168.91 0 top
R72  5k  [R0805]  -54.61,168.91 0 top
R73  12k  [R0805]  -60.96,168.91 0 top
R74  12k  [R0805]  -67.31,168.91 0 top
R75  220R  [R0805]  -140.97,156.21 0 top
R76  1k  [R0805]  -73.66,168.91 0 top
R77  5K  [R0805]  54.61,348.11 270 top
R78  1M  [R0805]  50.8,354.33 0 top
R79  110k  [R0805]  45.72,354.33 0 top
R80  130R  [R0603]  -30.48,185.42 0 top
R81  220R  [R0805]  54.61,343.66 270 top
R82  130R  [R0603]  -36.83,185.42 0 top
R83  130R  [R0603]  -43.18,185.42 0 top
R84  130R  [R0603]  -49.53,185.42 0 top
R85  130R  [R0603]  -55.88,185.42 0 top
R86  130R  [R0603]  -62.23,185.42 0 top
R87  130R  [R0603]  -68.58,185.42 0 top
R88  130R  [R0603]  -74.93,185.42 0 top
R89  130R  [R0603]  -81.28,185.42 0 top
R90  10k  [R0603]  -133.35,195.58 0 top
R91  130R  [R0603]  -87.63,185.42 0 top
R92  130R  [R0603]  -93.98,185.42 0 top
R93  130R  [R0603]  -100.33,185.42 0 top
R94  130R  [R0603]  -106.68,185.42 0 top
R95  130R  [R0603]  -113.03,185.42 0 top
R96  130R  [R0603]  -119.38,185.42 0 top
R97  130R  [R0603]  -125.73,185.42 0 top
R98  10k  [R0603]  -138.43,195.58 0 top
R99  10k  [R0603]  -143.51,195.58 0 top
R100  1M  [R0603]  -132.08,185.42 0 top
R101  nc  [R0603]  -138.43,185.42 0 top
R102  nc  [R0603]  -144.78,185.42 0 top
R103  10k  [R0603]  -151.13,185.42 0 top
R104  10k  [R0603]  -157.48,185.42 0 top
R105  4.7k  [R0603]  -163.83,185.42 0 top
R106  4.7k  [R0603]  -170.18,185.42 0 top
R107  10k  [R0805]  -153.67,156.21 0 top
R108  10k  [R0805]  -160.02,156.21 0 top
R109  10k  [R0805]  -166.37,156.21 0 top
R110  10k  [R0805]  -185.42,156.21 0 top
R111  10k  [R0603]  -55.88,190.5 0 top
R112  10k  [R0603]  -176.53,185.42 0 top
R113  10k  [R0603]  -182.88,185.42 0 top
R114  10k  [R0603]  -17.78,190.5 0 top
R115  10k  [R0603]  -24.13,190.5 0 top
R116  10k  [R0603]  -30.48,190.5 0 top
R117  10k  [R0603]  -36.83,190.5 0 top
R118  10k  [R0603]  -43.18,190.5 0 top
R119  200R  [R0805]  -172.72,156.21 0 top
R120  200R  [R0805]  44.45,341.63 90 top
S1  MOMENTARY-SWITCH-SPST-PTH-6.0MM  [TACTILE_SWITCH_PTH_6.0MM]  -35.56,115.57 0 top
S2  MOMENTARY-SWITCH-SPST-PTH-6.0MM  [TACTILE_SWITCH_PTH_6.0MM]  -53.34,115.57 0 top
T2  [TO92-CBE]  -152.4,147.32 0 top
TVS25V  SUPRESSOR_TVS-UD-SMAJ  [SUPRESSOR_SMAJ]  23.11,346.84 180 top
U1  PIC18F47J13-I/PT  [TQFP44_10X10MC_MCH]  57.15,299.72 0 top
U2  PIC32MX564F064L-I/PT  [TQFP100_12X12MC_MCH]  74.93,93.98 0 top
U3  ESP-32S  [ESP-32S]  -50.8,58.42 0 top
U4  140357145000  [WL-OCPT_SOP4]  -96.52,106.68 0 top
U5  MPU-6050  [24-VFQFN]  -85.09,106.68 0 top
U6  140357145000  [WL-OCPT_SOP4]  -110.49,106.68 0 top
U7  140357145000  [WL-OCPT_SOP4]  -124.46,106.68 0 top
U8  140357145000  [WL-OCPT_SOP4]  -138.43,106.68 0 top
U9  140357145000  [WL-OCPT_SOP4]  49.53,341.38 0 top
U10  140357145000  [WL-OCPT_SOP4]  -166.37,106.68 0 top
U11  140357145000  [WL-OCPT_SOP4]  87.63,358.9 270 top
U12  140357145000  [WL-OCPT_SOP4]  -20.32,116.84 0 top
U$1  MP6500  [QFN65P500X500X100-25N]  101.6,353.06 0 top
U$2  MP6500  [QFN65P500X500X100-25N]  119.38,353.06 0 top
U$3  MP6500  [QFN65P500X500X100-25N]  137.16,353.06 0 top
X5  FPS009-3000  [FPS009-3000]  -7.62,57.15 0 top

## Library data of the parts
BATT1 = mike
BSC027N04LSG1-BSC027N04LSG7 = transistor-power
C1-C15 C17 C19 C20 C24-C36 C41-C62 C67-C80 C83 = rcl; SPICEPREFIX: C
C16 C18 C21-C23 C81 C82 L3 R98-R106 = rcl
C37-C40 C63-C66 = rcl@1; SPICEPREFIX: C
CURRENT_SENSOR_0 CURRENT_SENSOR_1-CURRENT_SENSOR_3 = TLI4971A050T5UE0001XUMA1; AVAILABILITY: In Stock; DESCRIPTION: Current Sensor 50A 1 Channel Hall Effect, Open Loop Unidirectional 8-PowerTDFN; MF: Infineon Technologies; MP: TLI4971A050T5UE0001XUMA1; PACKAGE: PowerTDFN-8 Infineon Technologies; PRICE: None; PURCHASE-URL: https://pricing.snapeda.com/search/part/TLI4971A050T5UE0001XUMA1/?ref=eda
D2-D5 = diode
D6 = SparkFun-DiscreteSemi; PROD_ID: DIO-08199
D9-D11 = adafruit
IC1 U$1-U$3 = skorra
IC5 = skkumc
IC6 = silabs; MF: FARNELL; MPN: CP2102-GM; OC_FARNELL: 9282130; OC_NEWARK: 30K5635
J1 J2 = XT60-M; AVAILABILITY: In Stock; DESCRIPTION: Plug; DC supply; XT60; male; PIN: 2; for cable; soldered; 30A; 500V; MF: AMASS; MP: XT60-M; PACKAGE: Package; PRICE: None
J3 = skorra; AVAILABILITY: In Stock; DESCRIPTION: USB - micro B - Receptacle Connector 5 Position Board Edge, Cutout; Surface Mount, Right Angle; MF: Molex; MP: 47642-0001; PACKAGE: None; PRICE: None; PURCHASE-URL: https://pricing.snapeda.com/search/part/47642-0001/?ref=eda
JP1-JP35 = pinhead
L1 = 7443641500; DESCRIPTION: Wurth WE-HCF Series Shielded Wire-wound SMD Inductor with a MnZn Core, 15 uH +/-15% 30A Idc; HEIGHT: 15mm; MANUFACTURER_NAME: Wurth Elektronik; MANUFACTURER_PART_NUMBER: 7443641500; MOUSER_PART_NUMBER: 710-7443641500; MOUSER_PRICE-STOCK: https://www.mouser.co.uk/ProductDetail/Wurth-Elektronik/7443641500?qs=Zt3UNFD9mQgHteqNok2K9A%3D%3D
LED1-LED6 LED12-LED27 = led
LS2 = SparkFun-Electromechanical; PROD_ID: COMP-08253; SF_SKU: COM-07950
MCU_0_X1 MCU_1_X2 MCU_2_X1 = _con-JST-PA
MP005244 = PPTC_0ZCF0075AF2C; AVAILABILITY: In Stock; DESCRIPTION: 2920 SMT PPTC | 0.75 Ih | 603V; MF: Bel Fuse; MP: 0ZCF0075AF2C; PACKAGE: 2920 Bel Fuse; PRICE: None; PURCHASE-URL: https://pricing.snapeda.com/search/part/0ZCF0075AF2C/?ref=eda
PS1 = TEN_25-1211; DESCRIPTION: 25 Watt DC/DC converter, industrial, 2:1 input, encapsulated, 2" x 1.6" metal package; HEIGHT: 10mm; MANUFACTURER_NAME: Traco Power; MANUFACTURER_PART_NUMBER: TEN 25-1211; MOUSER_PART_NUMBER: 495-TEN25-1211; MOUSER_PRICE-STOCK: https://www.mouser.co.uk/ProductDetail/TRACO-Power/TEN-25-1211?qs=ckJk83FOD0XS9kGQInWe%252BQ%3D%3D
PS2-PS5 = skorra; AVAILABILITY: In Stock; DESCRIPTION: 1 Amp POL converter, industrial, 6-36 VDC input, pos.-pos. circuit, cost efficient, LM78 compatible, SIP-3; MF: Traco Power; MP: TSR 1-2433E; PACKAGE: NON-STANDARD-3 Traco Power; PRICE: None; PURCHASE-URL: https://pricing.snapeda.com/search/part/TSR 1-2433E/?ref=eda
Q1 Q8 = transistor-fet
R1-R48 R51-R60 R62-R97 R107-R120 = rcl; SPICEPREFIX: R
R49 R50 = rcl@1; SPICEPREFIX: R
S1 S2 = SparkFun-Switches; PROD_ID: SWCH-08441; SF_SKU: COM-00097
T2 = transistor
TVS25V = 52101-101-REV-A_v16
U1 = skorra; COPYRIGHT: Copyright (C) 2022 Ultra Librarian. All rights reserved.; MANUFACTURER_PART_NUMBER: pic18f47j13-i/pt; MFR_NAME: Microchip
U2 = skorra; COPYRIGHT: Copyright (C) 2022 Ultra Librarian. All rights reserved.; MANUFACTURER_PART_NUMBER: PIC32MX564F064L-I/PT; MFR_NAME: Microchip
U3 = skorra; AVAILABILITY: Not in stock; DESCRIPTION: - - Transceiver Module - - Surface Mount; MF: Olimex LTD; MP: ESP-32S; PACKAGE: None; PRICE: None
U4 U6-U12 = Wurth_Optocoupler_WL-OCPT; CTR-MAX: 600%; CTR-MIN: 50%; DATASHEET-URL: https://www.we-online.com/redexpert/spec/140357145000?ae; IF: 60mA; MOUNT: SMT; PART-NUMBER: 140357145000; TC-CTR: IF = 5mA,VCE = 5 V; VCE: 35V; VISO: 3750(V(RMS))
U5 = Sensor; CREATED_BY: PCBLayout.com; DIGIKEY_PART_NUMBER: 1428-1007-1-ND; MANUFACTURER: TDK InvenSense; MPN: MPU-6050; PACKAGE: 24-VFQFN
X5 = con-yamaichi; OC_FARNELL: unknown; OC_NEWARK: unknown

## Nets
3V3_0: C8.2 C9.2 C10.2 C12.2 C14.1 C16.1 C18.1 C20.2 C21.1 C22.1 C23.1 C26.2 C29.2 C32.2 C44.1 C45.1 C49.1 C63.2 C64.2 C65.2 C66.2 C68.1 CURRENT_SENSOR_0.1 CURRENT_SENSOR_1.1 CURRENT_SENSOR_2.1 CURRENT_SENSOR_3.1 IC1.13 IC1.28 JP6.1 JP14.1 JP15.1 JP16.1 JP17.1 JP24.1 MCU_0_X1.P$5 MCU_1_X2.P$5 MCU_2_X1.P$5 PS3.3 PS4.3 R8.2 R10.2 R12.2 R14.1 R16.1 R18.1 R20.1 R29.1 R30.1 R34.1 R36.1 R37.1 R40.1 R45.1 R69.2 R70.2 R71.2 R72.2 R90.2 U1.7 U1.28 U2.2 U2.16 U2.30 U2.37 U2.46 U2.62 U2.86 U5.8 U5.13
3V3_1: C5.1 C39.1 C40.1 C70.1 C82.1 IC5.1 IC6.6 JP1.1 JP8.1 JP9.1 JP26.3 JP30.1 JP31.1 L3.2 PS2.3 PS5.3 R5.1 R26.1 R27.1 R28.1 R31.1 R50.2 R73.1 R74.2 R98.2 R99.2 R101.1 R102.1 R103.2 R104.2 R105.2 R106.2 U3.2
5V: C48.1 C50.1 C67.1 C69.1 C71.1 JP5.2 JP22.1 JP23.3 LS2.+ PS1.1 PS2.1 PS3.1 PS4.1 PS5.1 R47.1 U10.4
12V_STEPPER_0_POS: C36.1 C41.1 C42.1 C43.1 CURRENT_SENSOR_0.7 U$1.10 U$1.22
12V_STEPPER_1_POS: C53.1 C54.1 C55.1 C56.1 CURRENT_SENSOR_1.7 U$2.10 U$2.22
!CP_SUSPEND: IC6.11 R49.2
BATT_ADC: R6.1 R7.2 U1.21
BATT_DIRECT_POS_POLE: J1.2 JP32.1 JP32.2
BATT_GND: BSC027N04LSG1.1 BSC027N04LSG1.2 BSC027N04LSG1.3 BSC027N04LSG3.1 BSC027N04LSG3.2 BSC027N04LSG3.3 BSC027N04LSG4.1 BSC027N04LSG4.2 BSC027N04LSG4.3 BSC027N04LSG5.1 BSC027N04LSG5.2 BSC027N04LSG5.3 BSC027N04LSG6.1 BSC027N04LSG6.2 BSC027N04LSG6.3 BSC027N04LSG7.1 BSC027N04LSG7.2 BSC027N04LSG7.3 C2.- C3.- C72.- C80.- C83.2 D11.A J1.1 L1.3 PS1.6 R1.1 R23.2 R63.2 R65.2 R67.2 R68.2 R76.2 TVS25V.A
BATT_POS: C59.1 C60.1 C61.1 C62.1 C83.1 CURRENT_SENSOR_0.8 CURRENT_SENSOR_1.8 CURRENT_SENSOR_2.8 CURRENT_SENSOR_3.7 JP10.1 JP11.1 JP12.1 JP13.1 JP25.1 PS1.5 U4.4 U6.4 U7.4 U8.4 U12.4 U$3.10 U$3.22
BATT_POS_POLE: JP33.3 JP33.4 MP005244.2 Q8.3
BATT_POS_POLE_SWITCH: JP32.3 JP32.4 JP33.1 JP33.2
BLADE_MOTOR_NEG_EXT: BSC027N04LSG1.5 BSC027N04LSG1.6 BSC027N04LSG1.7 BSC027N04LSG1.8 D9.A D11.C JP7.3 JP7.4
BLADE_MOTOR_POS: CURRENT_SENSOR_2.7 D10.A U11.4
BLADE_MOTOR_POS_EXT: D9.C D10.C JP7.1 JP7.2
CP2102_RXD: IC6.25 U3.35
CP2102_TXD: IC6.26 U3.34
CP_RST: IC6.9 R50.1
CP_SUSPEND: IC6.12
CURRENT_SENSOR_3_POS: C2.+ C3.+ C72.+ CURRENT_SENSOR_3.8 L1.1 R6.2
D_N: D5.C IC6.5 J3.2
D_P: D4.C IC6.4 J3.3
EP: U5.25
EXTERNAL_GND: J2.1 R79.1 U9.3
EXTERNAL_INPUT_ADC: R78.1 R79.2 U1.22
EXTERNAL_POS: J2.2 Q8.2 R77.1 R78.2
GND: BATT1.MINUS BSC027N04LSG2.1 BSC027N04LSG2.2 BSC027N04LSG2.3 C1.2 C4.2 C5.2 C6.2 C7.2 C8.1 C9.1 C10.1 C11.2 C12.1 C13.2 C14.2 C15.2 C16.2 C17.2 C18.2 C19.2 C20.1 C21.2 C22.2 C23.2 C24.2 C25.2 C26.1 C27.2 C28.2 C29.1 C30.2 C31.2 C32.1 C33.2 C34.2 C37.1 C38.1 C39.2 C40.2 C41.2 C42.2 C43.2 C44.2 C45.2 C46.1 C47.2 C48.2 C49.2 C50.2 C51.2 C54.2 C55.2 C56.2 C57.2 C60.2 C61.2 C62.2 C63.1 C64.1 C65.1 C66.1 C67.2 C68.2 C69.2 C70.2 C71.2 C73.2 C74.2 C75.2 C76.2 C77.2 C78.2 C79.2 C81.2 C82.2 CURRENT_SENSOR_0.2 CURRENT_SENSOR_1.2 CURRENT_SENSOR_2.2 CURRENT_SENSOR_3.2 D2.C D3.A D4.A D5.A IC1.8 IC1.27 IC5.7 IC6.1 IC6.2 IC6.3 IC6.23 IC6.27 IC6.EXP IC6.M J3.4 J3.5 J3.S1 J3.S2 J3.S3 J3.S4 JP1.2 JP14.3 JP15.3 JP16.3 JP17.3 JP22.3 JP22.4 JP23.4 JP26.4 JP27.10 JP28.4 JP29.1 JP30.3 JP31.3 LED1.C LED2.C LED3.C LED4.C LED5.C LED6.C LED12.C LED13.C LED14.C LED15.C LED16.C LED17.C LED18.C LED19.C LED20.C LED21.C LED22.C LED23.C LED24.C LED25.C LED26.C LED27.C PS1.2 PS2.2 PS3.2 PS4.2 PS5.2 R2.1 R3.1 R7.1 R35.2 R41.2 R42.1 R46.2 R49.1 R54.2 R55.1 R56.1 R58.1 R64.1 R100.2 R109.1 R110.1 R111.2 R112.2 R113.2 R114.2 R115.2 R116.2 R117.2 R118.2 S1.3 S2.3 T2.E U1.6 U1.29 U2.15 U2.31 U2.36 U2.45 U2.55 U2.65 U2.75 U3.1 U3.15 U3.38 U3.GND U4.2 U5.9 U5.11 U5.18 U6.2 U7.2 U8.2 U9.2 U10.2 U11.2 U12.2 U$1.4 U$1.8 U$1.12 U$1.20 U$1.24 U$1.25 U$2.4 U$2.8 U$2.12 U$2.20 U$2.24 U$2.25 U$3.4 U$3.8 U$3.12 U$3.20 U$3.24 U$3.25 X5.3 X5.6 X5.COM_TERM
GPS_PPS: JP1.5
GPS_RXD: JP1.4 U2.48
GPS_TXD: JP1.3 U2.47
LIDAR_RX: JP5.4 JP21.2
LIDAR_TX: JP5.7 JP20.2
LIMIT_SWITCH_BOTTOM_MAGNET: JP35.1 R108.1
LIMIT_SWITCH_BOTTOM_MECHANICAL: JP35.3 R60.1
LIMIT_SWITCH_UPPER_MAGNET: JP34.1 R107.1
LIMIT_SWITCH_UPPER_MECHANICAL: JP34.3 R59.1
MCU_0_BUZZER: R24.1 U1.35
MCU_0_CHARGING_INPUT_ENABLE: R85.1 R120.1 U1.41
MCU_0_CURRENT_SENSOR_0: R15.2 U1.19
MCU_0_CURRENT_SENSOR_1: R17.2 U1.20
MCU_0_CURRENT_SENSOR_2: R19.2 U1.25
MCU_0_CURRENT_SENSOR_3: R21.2 U1.26
MCU_0_EMERGENCY_LIGHT: R119.1 U1.32
MCU_0_FAN_0: R22.1 R86.1 U1.2
MCU_0_FAN_1: R51.1 R87.1 U1.3
MCU_0_FAN_2: R53.1 R88.1 U1.4
MCU_0_FAN_3: R52.1 R89.1 U1.5
MCU_0_LED0: R82.1 U1.38
MCU_0_LED1: R83.1 U1.39
MCU_0_LED2: R80.1 U1.40
MCU_0_LIGHT_SENSOR: R66.1 U1.24
MCU_0_MCLR: MCU_0_X1.P$4 R11.1 U1.18
MCU_0_PGC: MCU_0_X1.P$3 U1.16
MCU_0_PGD: MCU_0_X1.P$2 U1.17
MCU_0_RAIN_SENSOR: JP6.2 JP24.2 R55.2 R57.1 R57.2 R64.2 R66.2 U1.27
MCU_0_TEMP_SENSOR_0: JP14.2 R69.1 U1.10
MCU_0_TEMP_SENSOR_1: JP15.2 R70.1 U1.11
MCU_0_TEMP_SENSOR_2: JP16.2 R71.1 U1.9
MCU_0_TEMP_SENSOR_3: JP17.2 R72.1 U1.8
MCU_0_TILT_SENSOR: C79.1 JP29.2 R90.1 U1.36
MCU_0_UART_RX: U1.1 U2.53
MCU_0_UART_TX: U1.44 U2.52
MCU_1_BLADE_MOTOR_PWM: IC1.18 R48.1 R97.1
MCU_1_LIMIT_SWITCH_BOTTOM: IC1.23 JP35.2
MCU_1_LIMIT_SWITCH_UPPER: IC1.24 JP34.2
MCU_1_MCLR: IC1.1 MCU_1_X2.P$4 R9.1
MCU_1_PGC: IC1.5 MCU_1_X2.P$3
MCU_1_PGD: IC1.4 MCU_1_X2.P$2
MCU_1_STEP_DRV_0_DIR: IC1.2 U$1.1
MCU_1_STEP_DRV_0_ENABLE: IC1.6 R94.1 U$1.18
MCU_1_STEP_DRV_0_MS1: IC1.7 U$1.7
MCU_1_STEP_DRV_0_MS2: IC1.9 U$1.6
MCU_1_STEP_DRV_0_STEP: IC1.3 U$1.13
MCU_1_STEP_DRV_1_DIR: IC1.10 U$2.1
MCU_1_STEP_DRV_1_ENABLE: IC1.12 R95.1 U$2.18
MCU_1_STEP_DRV_1_MS1: IC1.14 U$2.7
MCU_1_STEP_DRV_1_MS2: IC1.15 U$2.6
MCU_1_STEP_DRV_1_STEP: IC1.11 U$2.13
MCU_1_STEP_DRV_2_DIR: IC1.16 U$3.1
MCU_1_STEP_DRV_2_ENABLE: IC1.19 R96.1 U$3.18
MCU_1_STEP_DRV_2_MS1: IC1.21 U$3.7
MCU_1_STEP_DRV_2_MS2: IC1.22 U$3.6
MCU_1_STEP_DRV_2_STEP: IC1.17 U$3.13
MCU_1_UART1_RX: IC1.26 JP18.2
MCU_1_UART1_TX: IC1.25 JP19.2
MCU_2_LED0: R84.1 U2.93
MCU_2_LED1: R91.1 U2.94
MCU_2_LED2: R92.1 U2.98
MCU_2_LED3: R93.1 U2.99
MCU_2_LIDAR_ENABLE: R62.1 U2.38
MCU_2_LIDAR_UART5_RX: JP20.3 JP21.3 U2.40
MCU_2_LIDAR_UART5_TX: JP20.1 JP21.1 U2.39
MCU_2_MCLR: MCU_2_X1.P$4 R13.1 U2.13
MCU_2_PGC: MCU_2_X1.P$3 U2.24
MCU_2_PGD: MCU_2_X1.P$2 U2.25
MCU_2_UART3_RX: JP19.1 U2.11
MCU_2_UART3_TX: JP18.1 U2.12
MCU_3_BUTTON_0: C1.1 JP27.1 R111.1 U3.6
MCU_3_BUTTON_1: C4.1 JP27.2 R112.1 U3.7
MCU_3_BUTTON_2: C73.1 JP27.3 R113.1 U3.8
MCU_3_BUTTON_3: C74.1 JP27.4 R114.1 U3.9
MCU_3_BUTTON_4: C75.1 JP27.5 R115.1 U3.10
MCU_3_BUTTON_5: C76.1 JP27.6 R116.1 U3.11
MCU_3_BUTTON_6: C77.1 JP27.7 R117.1 U3.12
MCU_3_BUTTON_7: C78.1 JP27.8 R118.1 U3.13
MCU_3_I2C_SCL: IC5.3 JP23.1 R5.2 R105.1 U3.36
MCU_3_I2C_SDA: IC5.4 JP23.2 R26.2 R106.1 U3.33
MCU_3_LED_B: JP28.3 U3.23
MCU_3_LED_G: JP28.2 U3.24
MCU_3_LED_R: JP28.1 U3.26
MCU_3_SD_DET: R103.1 U3.22 X5.DETECT
MCU_3_SD_WRTPT: R104.1 U3.21 X5.WRITE_PROT
MCU_3_SPI_MISO: R99.1 U3.31 X5.7
MCU_3_SPI_MOSI: R98.1 U3.37 X5.2
MCU_3_SPI_SCK: U3.30 X5.5
MCU_3_SPI_SS: R100.1 U3.29 X5.1
MCU_3_TRIGGER_CAMERA: JP26.1 U3.14
MCU_3_UART1_RX: JP19.3 U3.17
MCU_3_UART1_TX: JP18.3 U3.18
MCU_3_UART2_RX: U2.10 U3.27
MCU_3_UART2_TX: U2.14 U3.28
MPU6050_INT: U5.12
MPU6050_SCL: R37.2 U2.50 U5.23
MPU6050_SDA: R36.2 U2.49 U5.24
N$1: D6.A Q1.1 R1.2
N$2: C80.+ D6.C L1.2 Q1.3
N$3: MP005244.1 Q1.2 TVS25V.C
N$4: C34.1 U$1.17
N$5: MCU_0_X1.P$1 MCU_1_X2.P$1 MCU_2_X1.P$1
N$6: C17.1 U2.85
N$7: C37.2 C38.2 D3.C IC6.7 IC6.8 J3.1
N$8: R3.2 U$1.5
N$9: C6.1 R8.1 R9.2
N$10: C13.1 IC1.20
N$11: C7.1 U1.23
N$12: C19.1 CURRENT_SENSOR_0.4 R15.1
N$13: C27.1 CURRENT_SENSOR_1.3 R16.2
N$14: C11.1 R10.1 R11.2
N$15: C15.1 R12.1 R13.2
N$16: C25.1 CURRENT_SENSOR_1.4 R17.1
N$17: C24.1 CURRENT_SENSOR_0.3 R14.2
N$18: C30.1 CURRENT_SENSOR_2.3 R18.2
N$19: C28.1 CURRENT_SENSOR_2.4 R19.1
N$20: C33.1 CURRENT_SENSOR_3.3 R20.2
N$21: C31.1 CURRENT_SENSOR_3.4 R21.1
N$22: BSC027N04LSG3.4 R68.1 U12.3
N$23: JP27.9 R27.2
N$24: R24.2 T2.B
N$25: R48.2 U11.1
N$26: BSC027N04LSG1.4 R23.1 U11.3
N$28: LS2.- R25.2
N$29: JP22.2 R4.2
N$30: LED2.A R28.2
N$31: BSC027N04LSG2.5 BSC027N04LSG2.6 BSC027N04LSG2.7 BSC027N04LSG2.8 JP5.5
N$32: C35.2 U$1.15
N$33: C35.1 U$1.16
N$34: R32.2 U$1.2
N$35: BSC027N04LSG3.5 BSC027N04LSG3.6 BSC027N04LSG3.7 BSC027N04LSG3.8 JP25.2
N$36: C36.2 U$1.14
N$37: C51.1 U$2.17
N$39: R119.2 U12.1
N$40: R35.1 U$1.3
N$41: R2.2 U$2.5
N$42: C52.2 U$2.15
N$43: C46.2 U5.20
N$44: C47.1 U5.10
N$45: C52.1 U$2.16
N$46: C53.2 U$2.14
N$47: R41.1 U$2.3
N$48: R38.2 U$2.2
N$49: C57.1 U$3.17
N$50: R42.2 U$3.5
N$51: C58.2 U$3.15
N$52: C58.1 U$3.16
N$53: C59.2 U$3.14
N$54: R46.1 U$3.3
N$55: R43.2 U$3.2
N$57: LED3.A R29.2
N$58: LED4.A R30.2
N$59: LED5.A R31.2
N$60: LED6.A R47.2
N$61: R25.1 T2.C
N$62: R22.2 U4.1
N$63: JP8.2 R56.2 R59.2
N$64: JP9.2 R58.2 R60.2
N$65: BSC027N04LSG4.5 BSC027N04LSG4.6 BSC027N04LSG4.7 BSC027N04LSG4.8 JP10.2
N$66: R51.2 U6.1
N$67: R52.2 U8.1
N$68: BSC027N04LSG4.4 R76.1 U4.3
N$69: BSC027N04LSG5.4 R63.1 U6.3
N$70: BSC027N04LSG5.5 BSC027N04LSG5.6 BSC027N04LSG5.7 BSC027N04LSG5.8 JP11.2
N$71: R53.2 U7.1
N$72: BSC027N04LSG6.4 R65.1 U7.3
N$73: BSC027N04LSG6.5 BSC027N04LSG6.6 BSC027N04LSG6.7 BSC027N04LSG6.8 JP12.2
N$74: BSC027N04LSG2.4 R54.1 U10.3
N$75: BSC027N04LSG7.4 R67.1 U8.3
N$76: BSC027N04LSG7.5 BSC027N04LSG7.6 BSC027N04LSG7.7 BSC027N04LSG7.8 JP13.2
N$78: R74.1 S2.1 U3.25
N$79: R73.2 S1.1 U3.3
N$80: R75.2 U3.16
N$81: LED1.A R75.1
N$83: R120.2 U9.1
N$84: Q8.1 R77.2 R81.1
N$85: R81.2 U9.4
N$86: R62.2 U10.1
N$88: LED12.A R80.2
N$89: LED13.A R82.2
N$90: LED14.A R83.2
N$91: LED15.A R84.2
N$92: LED16.A R85.2
N$93: LED17.A R86.2
N$94: LED18.A R87.2
N$95: LED19.A R88.2
N$96: LED20.A R89.2
N$97: LED21.A R91.2
N$98: LED22.A R92.2
N$99: LED23.A R93.2
N$100: LED24.A R94.2
N$101: LED25.A R95.2
N$102: LED26.A R96.2
N$103: LED27.A R97.2
N$104: R102.2 X5.9
N$105: R101.2 X5.8
N$106: BATT1.PLUS IC5.8
N$107: C81.1 L3.1 X5.4
N$109: JP31.2 R108.2 R109.2
N$110: JP30.2 R107.2 R110.2
PERIMETER_WIRE_SENSE: D2.A R4.1 U2.42
STEP_DRV_0_A1: JP2.1 U$1.23
STEP_DRV_0_A2: JP2.2 U$1.21
STEP_DRV_0_B1: JP2.3 U$1.9
STEP_DRV_0_B2: JP2.4 U$1.11
STEP_DRV_0_FAULT: R32.1 R33.2
STEP_DRV_0_SLEEP: R33.1 R34.2 U$1.19
STEP_DRV_1_A1: JP3.1 U$2.23
STEP_DRV_1_A2: JP3.2 U$2.21
STEP_DRV_1_B1: JP3.3 U$2.9
STEP_DRV_1_B2: JP3.4 U$2.11
STEP_DRV_1_FAULT: R38.1 R39.2
STEP_DRV_1_SLEEP: R39.1 R40.2 U$2.19
STEP_DRV_2_A1: JP4.1 U$3.23
STEP_DRV_2_A2: JP4.2 U$3.21
STEP_DRV_2_B1: JP4.3 U$3.9
STEP_DRV_2_B2: JP4.4 U$3.11
STEP_DRV_2_FAULT: R43.1 R44.2
STEP_DRV_2_SLEEP: R44.1 R45.2 U$3.19
VBUS: U2.54